# Altium PCB PCB1.PcbDoc
Units mil, origin at the board's own origin, x right, y up, seen from the top; angles counter-clockwise.
Board outline 1775 x 3315 mil, 2 copper layers (Top Layer, Bottom Layer); 29 components, 18 nets, 110 pads, 9 vias.
Unrouted connection lines stored in the file: 1.
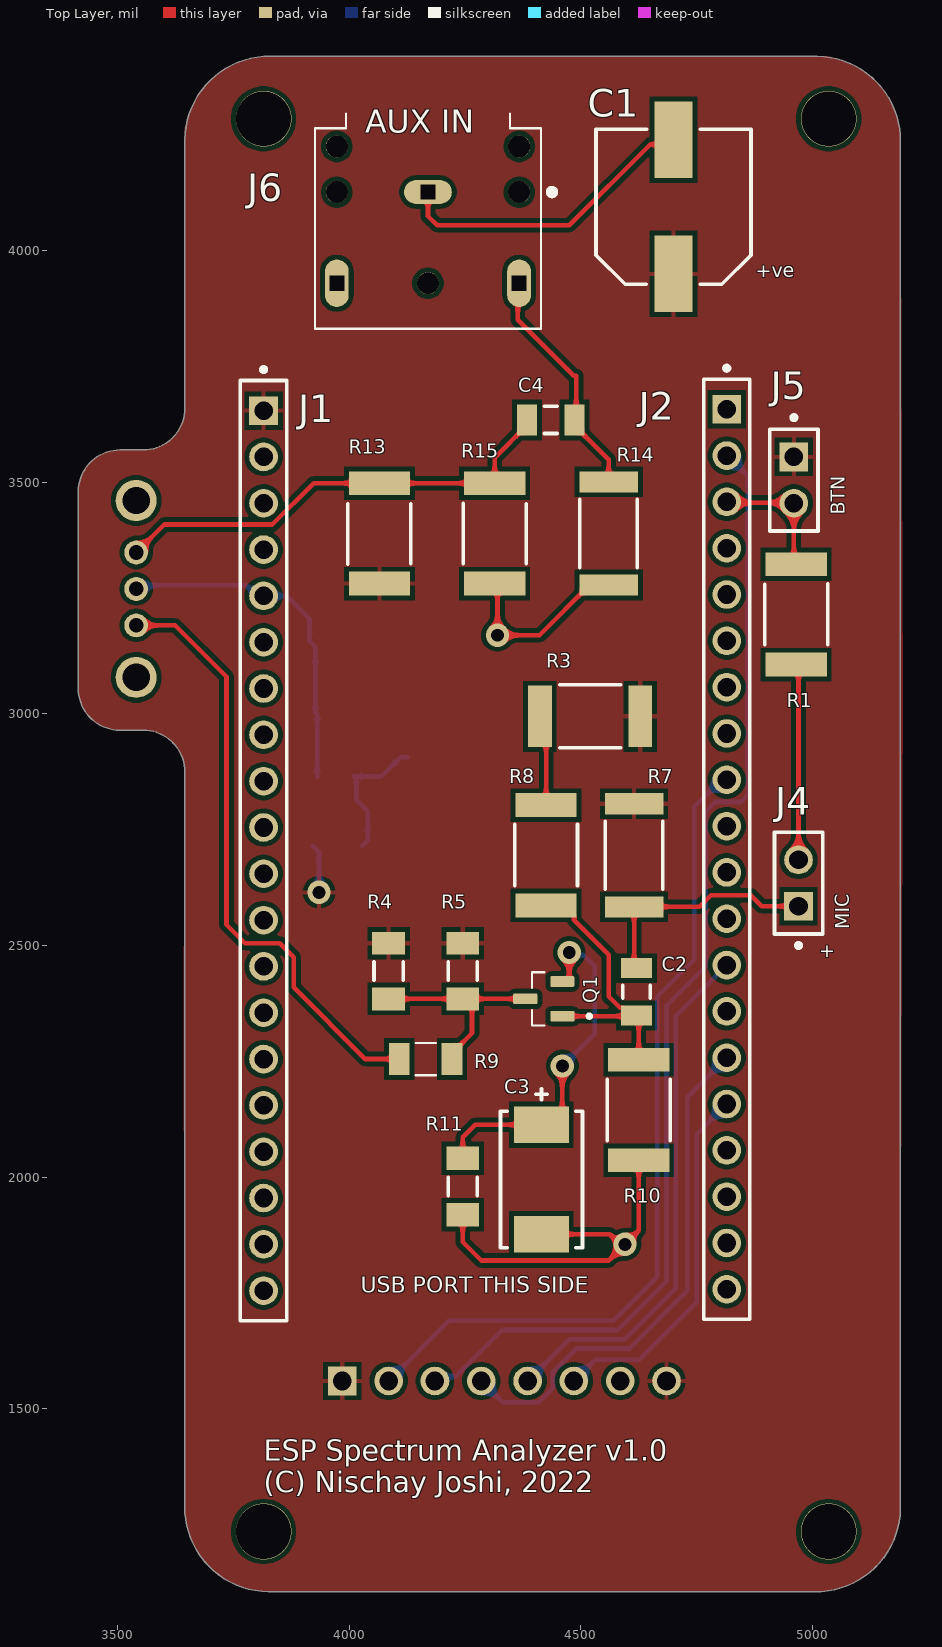
[diagram p0: Top Layer view]
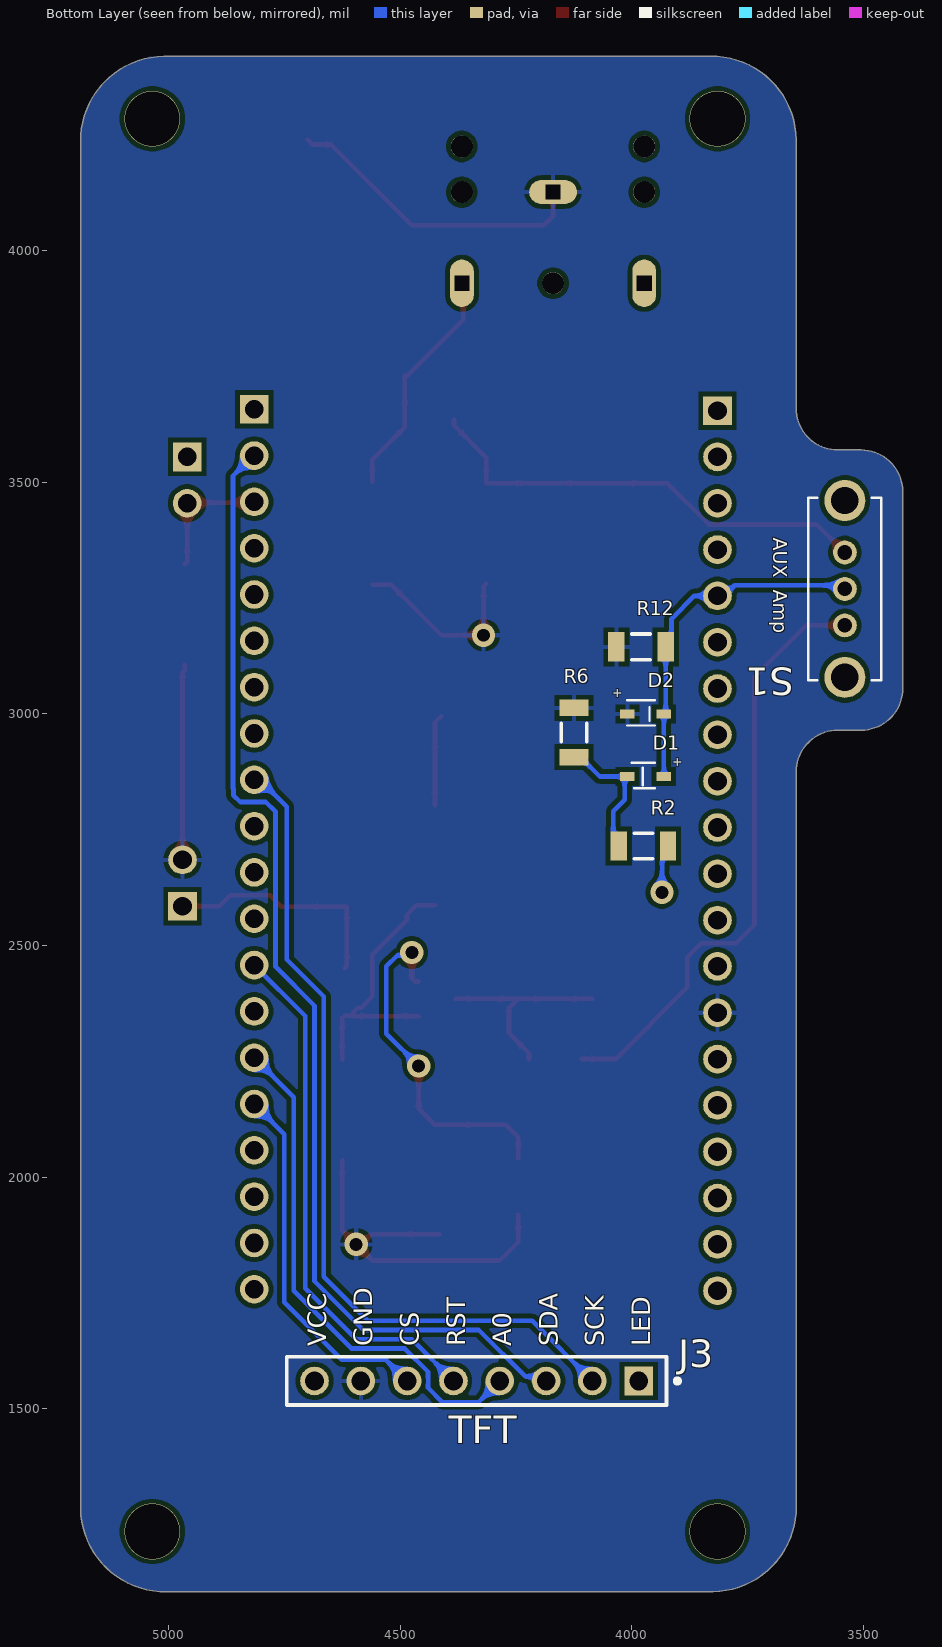
[diagram p1: Bottom Layer view, seen from below]
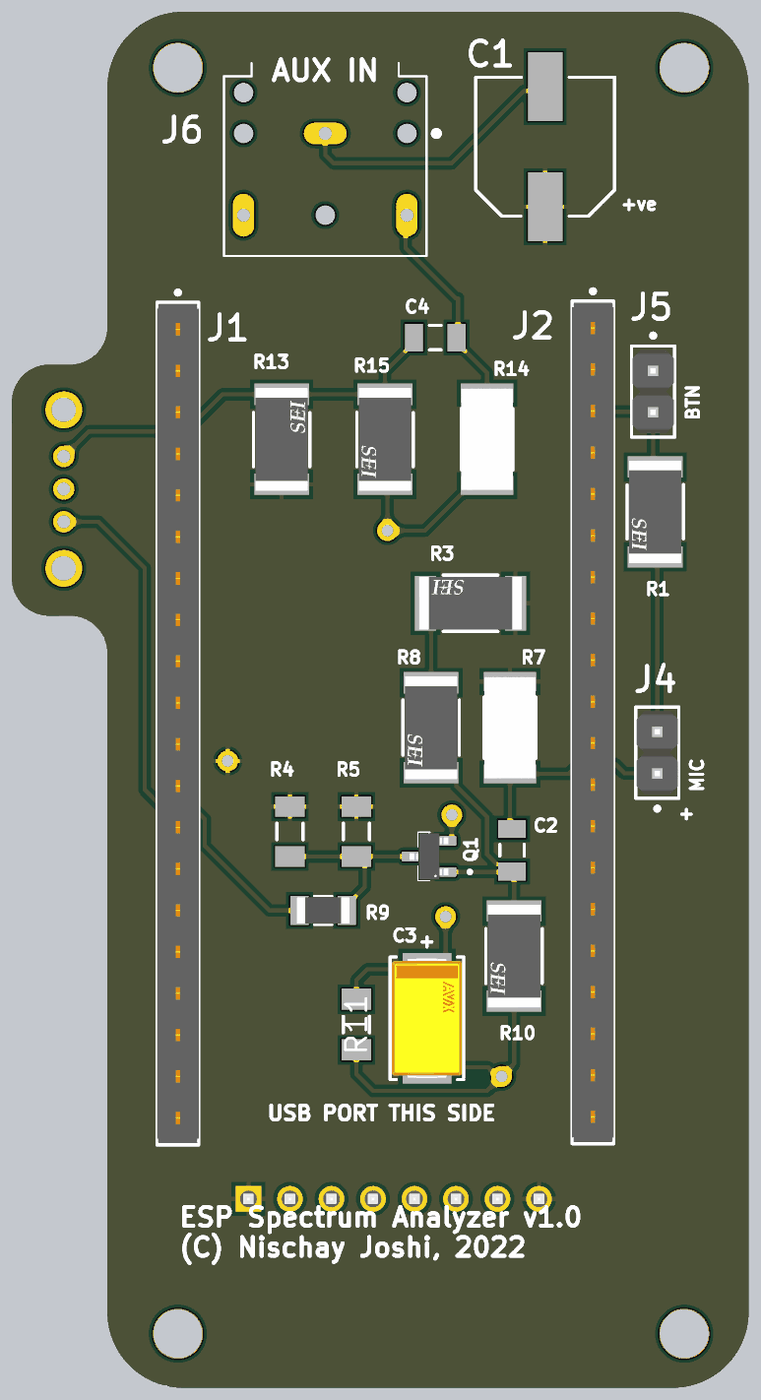
[diagram p2: 3D render of the assembled board from above, using the file's embedded part models]

## Layer stack, top to bottom
Top Solder: solder mask 0.4, Solder Resist, Dk 3.5
Top Layer: signal copper 1.4
Dielectric 1: dielectric 12.6, FR-4, Dk 4.8
Bottom Layer: signal copper 1.4
Bottom Solder: solder mask 0.4, Solder Resist, Dk 3.5

## Board outline
3505,2965 3555,2965 cw(c3555,2875) 3645,2875 3645,1290 ccw(c3827.5,1287.5) 3825,1105 5005,1105 ccw(c5007.5,1287.5) 5190,1285 5190,4235 ccw(c5007.5,4237.5) 5010,4420 3830,4420 ccw(c3827.5,4237.5) 3645,4240 3645,3660 cw(c3555,3660) 3555,3570 3505,3570 ccw(c3505,3480) 3415,3480 3415,3055 ccw(c3505,3055)

## Design rules (kind name [scope] priority, off if disabled: settings)
Clearance [All] p1: gap=10 ignorepadtopadclearanceinfootprint=FALSE except(0: Arc-Hole Track-Hole SMDPad-Hole THPad-Hole Via-Hole Fill-Hole Poly-Hole Region-Hole Text-Hole)
HoleSize [All] p1: absolutevalues=TRUE maxlimit=500 minlimit=1 maxpercent=80.000 minpercent=20.000
HoleToHoleClearance [All] p1: gap=1 allowstackedmicrovias=TRUE
PolygonConnect [All] p1: connectstyle=Relief reliefconductorwidth=10 reliefentries=4 polygonreliefangle="90 Angle" airgapwidth=10
RoutingVias [All] p1: holewidth=28 width=50 viastyle="Through Hole" minholewidth=28 minwidth=50 maxholewidth=28 maxwidth=50
SolderMaskExpansion [All] p1: expansion=4 istentingtop=FALSE
Width [All] p1: maxlimit=10 minlimit=1 preferedwidth=10 minimp=50.000000 maximp=50.000000 favimp=50.000000
28 further rules are at their usual default settings.

## Classes and differential pairs
component class PCBSchematic: C1 C2 C3 C4 D1 D2 J1 J2 J3 J4 J5 Q1 R1 R3 R4 R5 R6 R7 R8 R9 R10 R11 R12 R13 R14 R15 S1

## Components (designator, comment, footprint, x,y, rotation, side; value= is the part's Value field where it differs from the comment)
C1 "220uF(25V)" PNSC-EEE-FK1E221P_N 4700,4095 r90 top
C2 "1uF" CAPC3216X110X50LL20T25 4620,2400 r270 top
C3 "220uF(10V)" FP-TAJD-MFG 4415,1995 r90 top
C4 "1uF" CAPC3216X110X50LL20T25 4435,3635 r180 top
D1 "1N4148W" SOD523F 3970,2865 r0 bottom
D2 "1N4148W" SOD523F 3970,3000 r180 bottom
J1 "ESP_LEFT" FP-ESQ-120-14-G-S-MFG 3815,2705 r270 top
J2 "ESP_RIGHT" FP-ESQ-120-14-G-S-MFG 4815,2707.95 r270 top locked
J3 "TFT_SCREEN" FP-M20-9990846-MFG 4335,1560 r0 bottom
J4 "MICROPHONE INPUT" FP-M20-9990246-MFG 4970,2635 r90 top
J5 "BUTTON" FP-M20-9990246-MFG 4960,3505 r270 top
J6 "SJ1-3523N" CUI_SJ1-3523N 4170,4126.85 r270 top
Q1 "MMBT3904_RF" SOT95P237X112-3N 4420,2385 r180 top
R1 "10k" FP-RMCF2512-IPC_C 4965,3215 r270 top
R2 "5.6K" RESC3216X60X45LL10T20 3975,2715 r180 bottom
R3 "10k" FP-RMCF2512-IPC_C 4520,2995 r180 top
R4 "2.2K" RESC3116X65X40ML10T20 4085,2445 r90 top
R5 "2.2K" RESC3116X65X40ML10T20 4245,2445 r90 top
R6 "5.6K" RESC3216X60X45LL10T20 4125,2960 r270 bottom
R7 "1K" FP-CRCW2512-e3-IPC_C 4615,2695 r270 top
R8 "10k" FP-RMCF2512-IPC_C 4425,2695 r270 top
R9 "3.2K" RESC3116X65N 4165,2255 r180 top
R10 "10k" FP-RMCF2512-IPC_C 4625,2145 r270 top
R11 "470" RESC3216X60X45ML10T20 4245,1980 r90 top
R12 "5.6K" RESC3216X60X45LL10T20 3980,3145 r180 bottom
R13 "10k" FP-RMCF2512-IPC_C 4065,3390 r90 top
R14 "1K" FP-CRCW2512-e3-IPC_C 4560,3390 r270 top
R15 "10k" FP-RMCF2512-IPC_C 4313.98,3390 r270 top
S1 "EG1213" SW_EG1213 3540,3270 r90 bottom

## Footprints (in the part's own frame and the unit in brackets; to place one, negate y for a bottom-side part, rotate by r counter-clockwise, add the part's x,y. Pads: shape width x height; smd on the part's side, far side on the other; paste and mask are expansions set on the pad)
CAPC3216X110X50LL20T25 [mm] "Chip Capacitor, 2-Leads, Body 3.20x1.60mm, IPC High Density"
  rect 1.1x1.7 smd: 1(-1.3,0) 2(1.3,0)
  silkscreen extent -0.35,-0.75 0.35,0.75
CUI_SJ1-3523N [mm]
  oval 1.308x2.616 hole 0.8 square: 1(0,0)
  oval 2.616x1.308 hole 0.8 square: 2(5,-5) 3(5,5)
  round 1.2 hole 1.2 unplated: ""(-2.5,5) ""(-2.5,-5) ""(0,5) ""(0,-5) ""(5,0)
  silkscreen extent -4.3,-6.2 7.5,6.97
FP-CRCW2512-e3-IPC_C [mil]
  rect 45.47x126.31 smd paste+0 mask+0: 1(-111.25,0) 2(111.25,0)
  silkscreen extent -74,-62 74,62, body extent -138,-69 138,69, height 10
FP-ESQ-120-14-G-S-MFG [mm]
  rect 1.57x1.57 hole 1.02 paste-1000 mask+0: 1(-24.13,0)
  round 1.57 hole 1.02 paste-1000 mask+0: 2(-21.59,0) 3(-19.05,0) 4(-16.51,0) 5(-13.97,0) 6(-11.43,0) 7(-8.89,0) 8(-6.35,0) 9(-3.81,0) 10(-1.27,0) 11(1.27,0) 12(3.81,0) 13(6.35,0) 14(8.89,0) 15(11.43,0) 16(13.97,0) 17(16.51,0) 18(19.05,0) 19(21.59,0) 20(24.13,0)
  silkscreen extent -26.51,-1.27 25.78,1.27, body extent -25.88,-1.37 25.88,1.37, height 0.25
FP-M20-9990246-MFG [mm]
  rect 1.57x1.57 hole 1.02 paste-1000 mask+0: 1(-1.27,0)
  round 1.57 hole 1.02 paste-1000 mask+0: 2(1.27,0)
  silkscreen extent -3.55,-1.32 2.79,1.32, body extent -2.89,-1.42 2.89,1.42, height 0.25
FP-M20-9990846-MFG [mm]
  rect 1.57x1.57 hole 1.02 paste-1000 mask+0: 1(-8.89,0)
  round 1.57 hole 1.02 paste-1000 mask+0: 2(-6.35,0) 3(-3.81,0) 4(-1.27,0) 5(1.27,0) 6(3.81,0) 7(6.35,0) 8(8.89,0)
  silkscreen extent -11.13,-1.32 10.41,1.32, body extent -10.16,-1.27 10.16,1.27, height 8.9
FP-RMCF2512-IPC_C [mil]
  rect 51.35x132.09 smd paste+0 mask+0: 1(-108.31,0) 2(108.31,0)
  silkscreen extent -66,-68 65,68, body extent -138,-72 138,72, height 10
FP-TAJD-MFG [mm]
  rect 2x3 smd paste+0 mask+0: 1(-3,0) 2(3,0)
  silkscreen extent -3.75,-2.25 4.97,2.25, body extent -4.1,-2.35 4.1,2.35, height 0.25
PNSC-EEE-FK1E221P_N [mm] "CAPAE, 2-Leads, Body 8.5x8.5mm, IPC Medium Density"
  rect 4.2x2.1 smd: 1(-3.675,0) 2(3.675,0)
  silkscreen extent -4.25,-4.25 4.25,4.25
RESC3116X65N [mm]
  rect 1.13x1.77 smd: 1(-1.445,0) 2(1.445,0)
  silkscreen extent -0.56,-0.88 0.56,0.88, body extent -1.6,-0.8 1.6,0.8, height 0.65
RESC3116X65X40ML10T20 [mm] "Chip Resistor, 2-Leads, Body 3.10x1.60mm, IPC Low Density"
  rect 1.25x1.8 smd: 1(-1.525,0) 2(1.525,0)
  silkscreen extent -0.5,-0.8 0.5,0.8
RESC3216X60X45LL10T20 [mm] "Chip Resistor, 2-Leads, Body 3.20x1.60mm, IPC High Density"
  rect 0.9x1.6 smd: 1(-1.35,0) 2(1.35,0)
  silkscreen extent -0.5,-0.7 0.5,0.7
RESC3216X60X45ML10T20 [mm] "Chip Resistor, 2-Leads, Body 3.20x1.60mm, IPC Low Density"
  rect 1.3x1.8 smd: 1(-1.55,0) 2(1.55,0)
  silkscreen extent -0.5,-0.8 0.5,0.8
SOD523F [mm]
  rect 0.8x0.5 smd: 1(-1,0) 2(1,0)
  silkscreen extent -0.51,-0.76 0.76,0.64, body extent -1.34,-0.65 1.34,0.65, height 1.15
SOT95P237X112-3N [mm]
  rrect25% 1.32x0.59 smd: 1(-1.015,0.95) 2(-1.015,-0.95) 3(1.015,0)
  silkscreen extent -2.6,-1.46 0.65,1.46, body extent -1.18,-1.45 1.18,1.45, height 1.3
SW_EG1213 [mm]
  round 1.308 hole 0.8: 1(-2,0) 2(0,0) 3(2,0)
  round 2.25 hole 1.5: P$4(-4.85,0) P$5(4.85,0)
  silkscreen extent -5,-2 5,2

## Part data
C1: library part CMP-1665-00017-3, "Aluminum Electrolytic Capacitor, 220 uF, +/- 20%, 25 V, -55 to 105 degC, 2-Pin CAPAE, RoHS, Tape and Reel", Manufacturer=Panasonic, Max Operating Temperature="105 degC", Min Operating Temperature="-55 degC", Package Quantity=500, Voltage Rating="25 V", ComponentLink1Description="Manufacturer URL", ComponentLink1URL=http://www.panasonic.com/, ComponentLink2Description=Datasheet, ComponentLink2URL=http://industrial.panasonic.com/cdbs/www-data/pdf/RDE0000/ABA0000C1181.pdf, DatasheetVersion=03/2016, Height="10.2 mm", Lead Pitch="3.1 mm", Length="10.2 mm", Mount="Surface Mount", Mounting Technology="Surface Mount", PackageDescription="2-Pin Electrolytic Aluminum Capacitor, Body 8.3 x 8.3 mm", PackageReference=EEE-FK1E221P, Packaging="Tape and Reel", Pins=2, REACH SVHC="No SVHC", RoHSCompliant=true
C2 C4: library part CMP-2000-06011-1, "Chip Capacitor, 1 uF, +/- 10%, 50 V, -55 to 125 degC, 1206 (3216 Metric), RoHS, Tape and Reel", Capacitance - nF=1000nF, Case Code - in=1206, Case Code - mm=3216, Case Height=1mm, Case Length=3.2mm, Case Width=1.6mm, Dielectric=X7R, Manufacturer=Kemet, Maximum Operating Temperature=+125C, Minimum Operating Temperature=-55C, Operating Temperature Range=-55Cto+125C, Package / Case=1206(3216metric), Package Description="2-Pin Surface Mount Device, Body 3.2 x 1.6 mm", Temperature Coefficient / Code=+/-15%, Tolerance=10%, Voltage Rating=50V, Brand=Kemet, Capacitance=1uF, Class=Class1, Datasheet URL=http://www.kemet.com/docfinder?Partnumber=C1206C105K5RACTU, Datasheet Version=02/2016, Dimensions=1.6mmWx3.2mmLx1mmH, Factory Pack Quantity=2500, Manufacturer URL=http://www.kemet.com/, Mounting Technology=SurfaceMount, Package Reference=1206, Packaging=Reel, Product=GeneralTypeMLCCs, Product Category=MultilayerCeramicCapacitorsMLCC-SMD/SMT, RoHS=Details, Series=C1206C, Termination Style=SMD/SMT, Type=SMDMLCCX7R6.3-250VDCCommericalGrade, Voltage Rating DC=50V
C3: library part CMP-04424-000647-1, "220uF 10V  ±10% 500mΩ 2917  SMD Tantalum Capacitor", Capacitance=220uF, Case Code (Imperial)=2917, Case Code (Metric)=7343, Dielectric Material=Tantalum, ESR (Equivalent Series Resistance)=500mR, Leakage Current=22uA, Max Operating Temperature=125°C, Min Operating Temperature=-55°C, Package Quantity=1, Tolerance=10%, Voltage=10V, Case/Package=2917, Construction=Flat, Depth=4.3mm, Dissipation Factor=8%, Features="General Purpose", Height=2.9mm, Height - Seated (Max)=0.122inch, Lead Free="Lead Free", Length=7.3mm, Mount="Surface Mount", Number of Pins=2, Packaging="Tape and Reel", Polarity=Polar, Radiation Hardening=No, REACH SVHC="No SVHC", RoHS Compliant=Yes, Series=TAJ, Termination=SMD/SMT, Voltage Rating=10V, Voltage Rating (DC)=10V, Width=4.3mm
D1 D2: "Small signal diode. 150mA, 100V, SOD523F, RS: 761-4283 Fairchild Semiconductor Mfr. Part No. 1N4148WT", Package=None, Availability=Unavailable, MF="{'manufacturer': u'Diotec Semiconductor'}", MP=1N4148W, Price=None
J1 J2: library part CMP-02766-000124-1, "CONN SOCKET 20POS 0.1 GOLD PCB", Color=Black, Contact Resistance=10mR, Max Current Rating=6.9A, Max Operating Temperature=125°C, Max Voltage Rating (AC)=550V, Min Operating Temperature=-55°C, Connector Type=Receptacle, Contact Material=Bronze, Contact Plating=Gold, Depth=2.41mm, Gender=Receptacle, Housing Color=Black, Housing Material=Polyester, Length=51.31mm, Mount="Through Hole", Number of Contacts=20, Number of Positions=20, Number of Rows=1, Orientation=Straight, Packaging=Rail/Tube, Pitch=2.54mm, Radiation Hardening=No, REACH SVHC="No SVHC", Termination=Solder
J3: library part CMP-15831-000033-1, "CONN HEADER VERT 8POS 2.54MM", Case/Package=SIL, Color=Black, Contact Resistance=30mR, Current Rating=3A, Insulation Resistance=1GR, Max Operating Temperature=105°C, Min Operating Temperature=-40°C, Package Quantity=1000, Connector Type="Male Pin", Contact Material=Brass, Contact Mating Length=0.24inch, Contact Plating=Tin, Contact Type="Male Pin", Depth=2.54mm, Gender=Male, Housing Color=Black, Housing Material=Nylon, Length=20.32mm, Max Current Rating=3A, Mount="Through Hole", Number of Contacts=8, Number of Positions=8, Number of Rows=1, Orientation=Straight, Packaging=Bulk, Pitch=2.54mm, Radiation Hardening=No, REACH SVHC="No SVHC", RoHS Compliant=Yes, Series=M20, Termination=Solder
J4 J5: library part CMP-15831-000009-1, "CONN HEADER VERT 2POS 2.54MM", Current Rating=3A, Manufacturer=Harwin, Manufacturer Part Number=M20-9990246, Temperature="-40°C to +105°C", Temperature Range High=+105°C, Temperature Range Low=-40°C, Automotive=No, Category=Conn, ComponentLink2Description=Datasheet, ComponentLink2URL=https://cdn.harwin.com/pdfs/M20-999.pdf, Conn Gender=Male, Conn Orientation=Vertical, Contact Material=Tin,Nickel, Device Class L1=Connectors, Device Class L2="Headers and Wire Housings", Device Class L3=unset, Digikey Description="CONN HEADER VERT 2POS 2.54MM", Height=8.99mm, Lead Free=Yes, Mouser Description="2.54mm (0.1\") Pitch SIL Vertical PC Tail Pin Header, 6.1mm mating pin height, tin, 2 contacts", Number of Contacts=2, Number of Rows=1, Octopart=https://octopart.com/m20-9990246-harwin-2590635, Package=M20-9990246, Pitch=2.54mm, RoHS=TRUE
J6: "3.5 mm Right-Angle Stereo Jack, 3 Pin PCB Mount, Non-Threaded", Package=None, Availability=Unavailable, MF="{'manufacturer': u'CUI Devices'}", MP=SJ1-3523N, Price=None
Q1: "Bipolar (BJT) Transistor NPN 65 V 100 mA 100MHz 200 mW Surface Mount SOT-23", Package=None, Availability=Unavailable, MF="{'manufacturer': u'Taiwan Semiconductor'}", MP=MMBT3904_RF, Price=None
R1 R3 R8 R10 R13 R15: library part CMP-26527-007115-1, "10kΩ ±5% 1W 2512 Thick Film Chip Resistor AEC-Q200 compliant", Case Code (Imperial)=2512, Case Code (Metric)=6432, Max Operating Temperature=155°C, Max Power Dissipation=1W, Min Operating Temperature=-55°C, Resistance=10kR, Resistor Type="Thick Film", Temperature Coefficient=200ppm/°C, Tolerance=5%, Case/Package=2512, Construction=Rectangular, Contact Plating=Tin, Depth=3.2mm, Features="Automotive AEC-Q200", Height=0.028inch, Lead Free="Lead Free", Length=0.248inch, Military Standard=Not, Mount="Surface Mount", Number of Terminations=2, Packaging="Tape and Reel", Power Rating=1W, Radiation Hardening=No, RoHS Compliant=Yes, Series=RMCF, Size Code=2512, Width=0.126inch
R2 R6 R12: library part CMP-2003-02302-1, Manufacturer="Vishay Dale", Part Number=CRCW12065K60FKEA
R4 R5: library part CMP-1014-00546-2, "Chip Resistor, 2.2 KOhm, +/- 1%, 250 mW, -55 to 155 degC, 1206 (3216 Metric), RoHS, Tape and Reel", Case Code (Imperial)=1206, Case Code (Metric)=3216, Manufacturer=Yageo, Max Operating Temperature=155degC, Max Power Dissipation=250mW, Min Operating Temperature=-55degC, Package Description="2-Pin Surface Mount Device, Body 3.1 x 1.6 mm", Package Quantity=1, Package Reference=1206.0, Resistance=2.2KOhm, Temperature Coefficient=100ppm/degreesC, Tolerance=1%, Voltage Rating=200V, Case/Package=1206, Composition=ThickFilm, Datasheet URL=http://www.yageo.com/NewPortal/yageodocoutput?fileName=/pdf/R-Chip/PYu-RC_Group_51_RoHS_L_5.pdf, Datasheet Version="Rev. 5, 10/2016", Depth=1.6mm, Height=0.55mm, Lead Free=LeadFree, Length=3.1mm, Manufacturer URL=http://www.yageo.com/, Military Standard=Not, Number of Terminations=2, Packaging=TapeandReel, Power Rating=250mW, REACH SVHC=Unknown, RoHSCompliant=true, Termination=SMD/SMT, Weight=0.000571oz, Width=0.063inch
R7 R14: library part CMP-02407-005880-1, "RES Thick Film, 1kΩ, 1%, 1W, 100ppm/°C, 2512", Case Code (Imperial)=2512, Case Code (Metric)=6432, Max Operating Temperature=155°C, Max Power Dissipation=1W, Min Operating Temperature=-55°C, Package Quantity=10, Resistance=1kR, Temperature Coefficient=100ppm/°C, Tolerance=1%, Voltage Rating=500V, Case/Package=2512, Composition="Thick Film", Contact Plating=Tin, Depth=3.15mm, Features="Automotive AEC-Q200", Height=0.6mm, Lead Free="Lead Free", Length=6.3mm, Military Standard=Not, Mount="Surface Mount", Number of Pins=2, Number of Terminations=2, Packaging="Tape and Reel", Power Rating=1W, Radiation Hardening=No, Termination=SMD/SMT, Voltage Rating (DC)=500V, Weight=0.001429oz, Width=3.15mm
R9: library part TNPW12063K20BEEN, "3.2K OHM .1% 25PPM", Package=None, Availability=Unavailable, MF="{'manufacturer': u'Vishay'}", MP=TNPW12063K20BEEN, Price=None
R11: library part CMP-2003-02206-1, Manufacturer="Vishay Dale", Part Number=CRCW1206470RFKEA
S1: "<b>EG Series SPDT On-On Right Angle Through Hole Slide Switch</b>", Package=None, Availability=Unavailable, MF="{'manufacturer': u'E-Switch'}", MP=EG1213, Price=None

## Via types
v1: diameter 50, hole 28, Top Layer to Bottom Layer, 5 vias
v2: diameter 120, hole 118, Top Layer to Bottom Layer, 4 vias

## Nets (pads, with @x,y where several pads share a name; then routed paths per layer and width w, separated by ;. In a path a pad name is that pad's centre, name@x,y a point inside that pad or via, vN(x,y) a via of type N, cw(c..) or ccw(c..) an arc to the next point about the centre after c; other vN are vias at no path point)
3V3: C1.1 J1.1 J3.1 J3.8 J5.1 R2.2 R3.1 R4.2 R5.2 R7.1 R13.1 | length 105.4
  Bottom Layer w10: R2.2 3934.57,2702.28 3934.57,2661.21 3935,2660.77 v1(3935,2615)
A0: J2.15 J3.4 | length 1122.5
  Bottom Layer w10: J3.4 4330.91,1514.09 4409.09,1514.09 4440,1545 4440,1550.93 cw(c4485,1560) 4440,1569.07 4440,1579.92 4490.08,1630 4605,1630 4729.8,1754.8 4729.8,2172.76 J2.15
AMP_OUT: R9.2 S1.1 | length 1307.4
  Top Layer w10: S1.1 3623.74,3191.26 3735,3080 3735,2545 3775,2505 3850,2505 3880,2475 3880,2410 4035,2255 R9.2
AUX_IN: C4.2 R13.2 R15.1 S1.3 | length 1001.6
  Top Layer w10: S1.3 3600.35,3409.09 3834.01,3409.09 3923.23,3498.31 R13.2 R15.1 4313.98,3553.35 4383.82,3623.19 C4.2
BUTTON_IN: J2.3 J5.2 R1.1 | length 280
  Top Layer w10: J2.3 4816.48,3456.48 4958.52,3456.48 J5.2 4960,3328.31 R1.1
CS: J2.16 J3.6 | length 790.3
  Bottom Layer w10: J3.6 4530.91,1605.91 4625.91,1605.91 4750,1730 4750,2092.95 J2.16
GND: C1.2 C3.1 D2.1 J1.14 J3.7 J4.2 J6.1 R1.2 R6.1 R10.2 R11.1 R12.1 R14.2 R15.2 | length 2299.2
  Top Layer w10: J6.1@4166.85,4111.85 4170,4108.7 4170,4075 4190,4055 4475,4055 4649.52,4229.52 4689.83,4229.52 C1.2 ; R11.1 4245,1860 4285,1820 4560,1820 v1(4595,1855) ; R15.2 4320,3275.67 v1(4320,3170) 4410.83,3170 4519.58,3278.75 R14.2 ; C3.1 4562.29,1876.89 4584.18,1855 v1(4595,1855) ; R10.2 4625,1885 v1(4595,1855) ; R1.2 4965,3095 4970,3090 J4.2
MIC_IN: C2.1 J4.1 R7.2 | length 509.5
  Top Layer w10: C2.1 4615,2456.18 R7.2 4756.41,2583.75 4781.03,2608.38 4867.19,2608.38 4890.57,2585 J4.1
NetC2_2: C2.2 Q1.1 R8.2 R10.1 | length 588.9
  Top Layer w10: R8.2 4464.94,2586.69 4485.62,2566.02 4485.62,2554.38 4560,2480 4560,2457.5 4560,2390 4584.53,2365.47 4591.54,2365.47 4601.18,2355.83 4601.18,2348.82 C2.2 ; Q1.1 C2.2@4601.18,2347.6 ; R10.1 C2.2@4625,2343.82
NetC3_2: C3.2 Q1.2 R11.2 | length 763.3
  Top Layer w10: R11.2 4245,2086.18 4271.93,2113.11 C3.2 4425.63,2113.11 4460,2147.48 v1(4460,2240) ; Q1.2 4468.39,2422.4 4475,2429.02 v1(4475,2485)
  Bottom Layer w10: v1(4460,2240) 4530,2310 4530,2455 4505.78,2479.22 4480.78,2479.22 v1(4475,2485)
NetC4_1: C4.1 J6.3 R14.1 | length 498
  Top Layer w10: J6.3@4363.7,3915 4363.7,3851.3 4485,3730 4490,3730 4490,3619.37 4560,3549.37 R14.1
NetD1_2: D1.2 R2.1 R6.2 | length 301.3
  Bottom Layer w10: R2.1 4040,2726.85 4040,2790 4015.43,2814.57 4015.43,2860.16 4010.59,2865 D1.2 4015.43,2865 4069.37,2865 4111.22,2906.85 R6.2
NetQ1_3: Q1.3 R4.1 R5.1 R9.1 | length 451.4
  Top Layer w10: R4.1 R5.1 ; R9.1 4221.89,2267.6 4265,2310.71 4265,2365.35 4245.39,2384.96 R5.1 ; Q1.3 R5.1 R5.1
NetR3_2: R3.2 R8.1 | length 197.2
  Top Layer w10: R3.2 4425,2981.69 R8.1
RST: J2.13 J3.5 | length 1156.4
  Bottom Layer w10: J3.5@4375,1560 J3.5 4475,1650 4595,1650 4705,1760 4705,2347.95 J2.13
SCK: J2.9 J3.2 | length 1815.3
  Bottom Layer w10: J3.2 4215,1690 4570,1690 4665,1785 4665,2390 4745,2470 4745,2800 4802.95,2857.95 J2.9
SDA: J2.2 J3.3 | length 2504.4
  Bottom Layer w10: J3.3 4185,1555 4199.91,1569.91 4229.99,1569.91 4330.08,1670 4580,1670 4685,1775 4685,2370 4769.09,2454.09 4769.09,2789.09 4790,2810 4845,2810 4860,2825 4860,2838.03 4860.91,2838.94 4860.91,3514.09 4817.05,3557.95 J2.2
SIGNAL_IN: D1.1 D2.2 J1.5 R12.2 S1.2 | length 758.3
  Bottom Layer w10: S1.2 3547.94,3277.94 3778.04,3277.94 3800.98,3255 J1.5@3818.36,3255 ; J1.5 3865,3255 3914.13,3205.87 3914.13,3157.72 R12.2 3926.85,3003.78 D2.2 D1.1
pads on no net: J1.2 J1.3 J1.4 J1.6 J1.7 J1.8 J1.9 J1.10 J1.11 J1.12 J1.13 J1.15 J1.16 J1.17 J1.18 J1.19 J1.20 J2.1 J2.4 J2.5 J2.6 J2.7 J2.8 J2.10 J2.11 J2.12 J2.14 J2.17 J2.18 J2.19 J2.20 J6. J6.2 S1.P$4 S1.P$5
copper on no net:
  other v2: 3815,1235 5035,1235 3815,4285 5035,4285

## Polygon pours and split planes (outlines as drawn)
3V3 on Top Layer "3V3_POLYGON" (solid, pour order 0): 3645,4265 3655.08,4297.37 3667.97,4326.17 3686.65,4353.58 3708.64,4376.01 3734.23,4394.39 3764.09,4408.65 3794.57,4417.02 3824.99,4420 5035,4420 5063.85,4411.1 5090.72,4399.94 5114.1,4385.65 5136.56,4366.56 5155.65,4344.1 5171.46,4317.69 5182.72,4288.59 5190,4260 5195,3055 5190,1642.19 5190,1280 5188.11,1256.38 5187.41,1252.2 5175.01,1211.94 5158.88,1185.53 5139.24,1161.18 5114.1,1139.35 5085.61,1122.54 5054.34,1111.09 5024.77,1105.8 3810.23,1105.8 3773.9,1113.03 3740.92,1126.82 3711.76,1146.38 3688.56,1169.15 3670.62,1194.22 3656.87,1222.7 3648.24,1253.16 3645,1285 3643.05,2371.32 3644.51,2884.36 3641.84,2898.66 3636.97,2912.16 3628.71,2925.77 3618.92,2938.36 3607.29,2948.25 3594,2956.11 3579.95,2961.47 3564.01,2965 3494.56,2965.61 3478.01,2969.14 3462.14,2975.86 3447.47,2985.79 3435.88,2997.36 3426.95,3010.19 3420.39,3024.33 3417.71,3031.79 3416.33,3039.58 3415,3047.12 3415,3055 3415.45,3489.03 3418.32,3506.53 3425.29,3521.79 3429.03,3528.26 3433.34,3534.45 3438.07,3540.17 3443.26,3545.48 3449.09,3550.91 3456.11,3555.56 3469.03,3562.5 3476.55,3565.7 3484.02,3567.52 3490.85,3568.88 3497.56,3569.69 3555,3570 3571.35,3571.5 3587.1,3575.92 3601.89,3583.18 3615.48,3593.35 3627.92,3607.25 3637.33,3623.64 3643.05,3641.34 3644.51,3650.64 3645,3660
GND on Bottom Layer "GND_PLOYGON" (solid, pour order 1): 5022.83,4420 5041.76,4418.83 5056.93,4413.2 5084.71,4402.88 5109.56,4388.82 5130.68,4372.18 5153.46,4347.08 5171.12,4318.38 5182.65,4288.83 5186.26,4274.32 5188.84,4258.17 5188.14,1261.41 5181.8,1233.34 5171.12,1206.62 5155.43,1180.59 5136.06,1157.94 5113.19,1138.7 5084.71,1122.12 5054.23,1111.07 5022.83,1105.63 3806.83,1106.16 3775.83,1112.45 3748.47,1122.98 3721.81,1138.7 3698.94,1157.94 3679.57,1180.59 3662.98,1208.47 3652.45,1235.83 3646.16,1266.83 3644.34,2885.85 3641.96,2900.04 3636.87,2912.39 3629.53,2925.45 3620.28,2936.96 3609.17,2946.87 3595.12,2955.56 3580.78,2961.23 3565.63,2964.37 3495.73,2965.48 3481.41,2968.15 3468.8,2972.6 3456.78,2979.01 3446.05,2986.99 3435.09,2998.32 3426.32,3011.3 3419.81,3025.98 3416.08,3041.13 3415,3480 3416.64,3497.08 3421.82,3514.37 3430.32,3530.22 3441.11,3543.39 3454.78,3554.68 3470.63,3563.18 3487.92,3568.36 3505,3570 3555,3570 3574.12,3572.05 3591.63,3577.79 3608.06,3587.3 3621.68,3599.55 3633.11,3615.29 3640.77,3632.73 3644.28,3651.59 3644.34,3670.85 3646.16,4258.17 3653.71,4293.26 3667.95,4326.13 3688.11,4355.33 3711.4,4378.33 3734.92,4394.8 3764.49,4408.8 3793.98,4416.91 3824.99,4420

## Silkscreen, mask and mechanical layers (free items; w line width, h text height)
Top Overlay:
  text "AUX IN" at 4035,4255 h50
  text "+ve" at 4878,3943 h30
  text "BTN" at 5070,3430 h30 r90
  text "MIC" at 5080,2535 h30 r90
  text "+" at 5015,2475 h30
  text "USB PORT THIS SIDE" at 4025,1750 h35
  text "ESP Spectrum Analyzer v1.0 / (C) Nischay Joshi, 2022" at 3815,1320 h45
Bottom Overlay:
  text "AUX  Amp" at 3695,3380 h30 r90
  text "+" at 4020,3036.67 h20
  text "+" at 3890,2886.67 h20
  text "LED" at 3960,1635 h40 r270
  text "SCK" at 4060,1635 h40 r270
  text "SDA" at 4160,1635 h40 r270
  text "A0" at 4260,1635 h40 r270
  text "RST" at 4360,1635 h40 r270
  text "CS" at 4460,1635 h40 r270
  text "GND" at 4560,1635 h40 r270
  text "VCC" at 4660,1635 h40 r270
  text "TFT" at 4395,1425 h60
Mechanical 13:
  lines w10: 3645.01,1289.99 ccw(c3827.49,1287.49) 3824.99,1105.01 5005,1105 ; 3645,1290 3645.01,1289.99 ; 3645,1290 3645,1290 ; 3645,1290 3645,2875 ccw(c3555,2875) 3555,2965 3505,2965 cw(c3505,3055) 3415,3055 3415,3480 cw(c3505,3480) 3505,3570 3555,3570 ccw(c3555,3660) 3645,3660 3645,4240 cw(c3827.5,4237.5) 3830,4420 5010,4420 ; 5005.01,1105.01 ccw(c5007.51,1287.49) 5189.99,1284.99 5190,4235 ; 5005,1105 5005.01,1105.01 ; 5005,1105 5005,1105 ; 5010,4420 cw(c5007.5,4237.5) 5190,4235 ; 5010,4420 5010,4420 ; 5190,4235 5190,4235